# Altium PCB HANDS_FREE_ControlUnit_V2.PcbDoc (part 3 of 3)
Units mil, origin at the board's own origin, x right, y up, seen from the top; angles counter-clockwise.
Board outline 2130 x 3330 mil, 2 copper layers (Top Layer, Bottom Layer); 111 components, 108 nets, 500 pads, 191 vias.
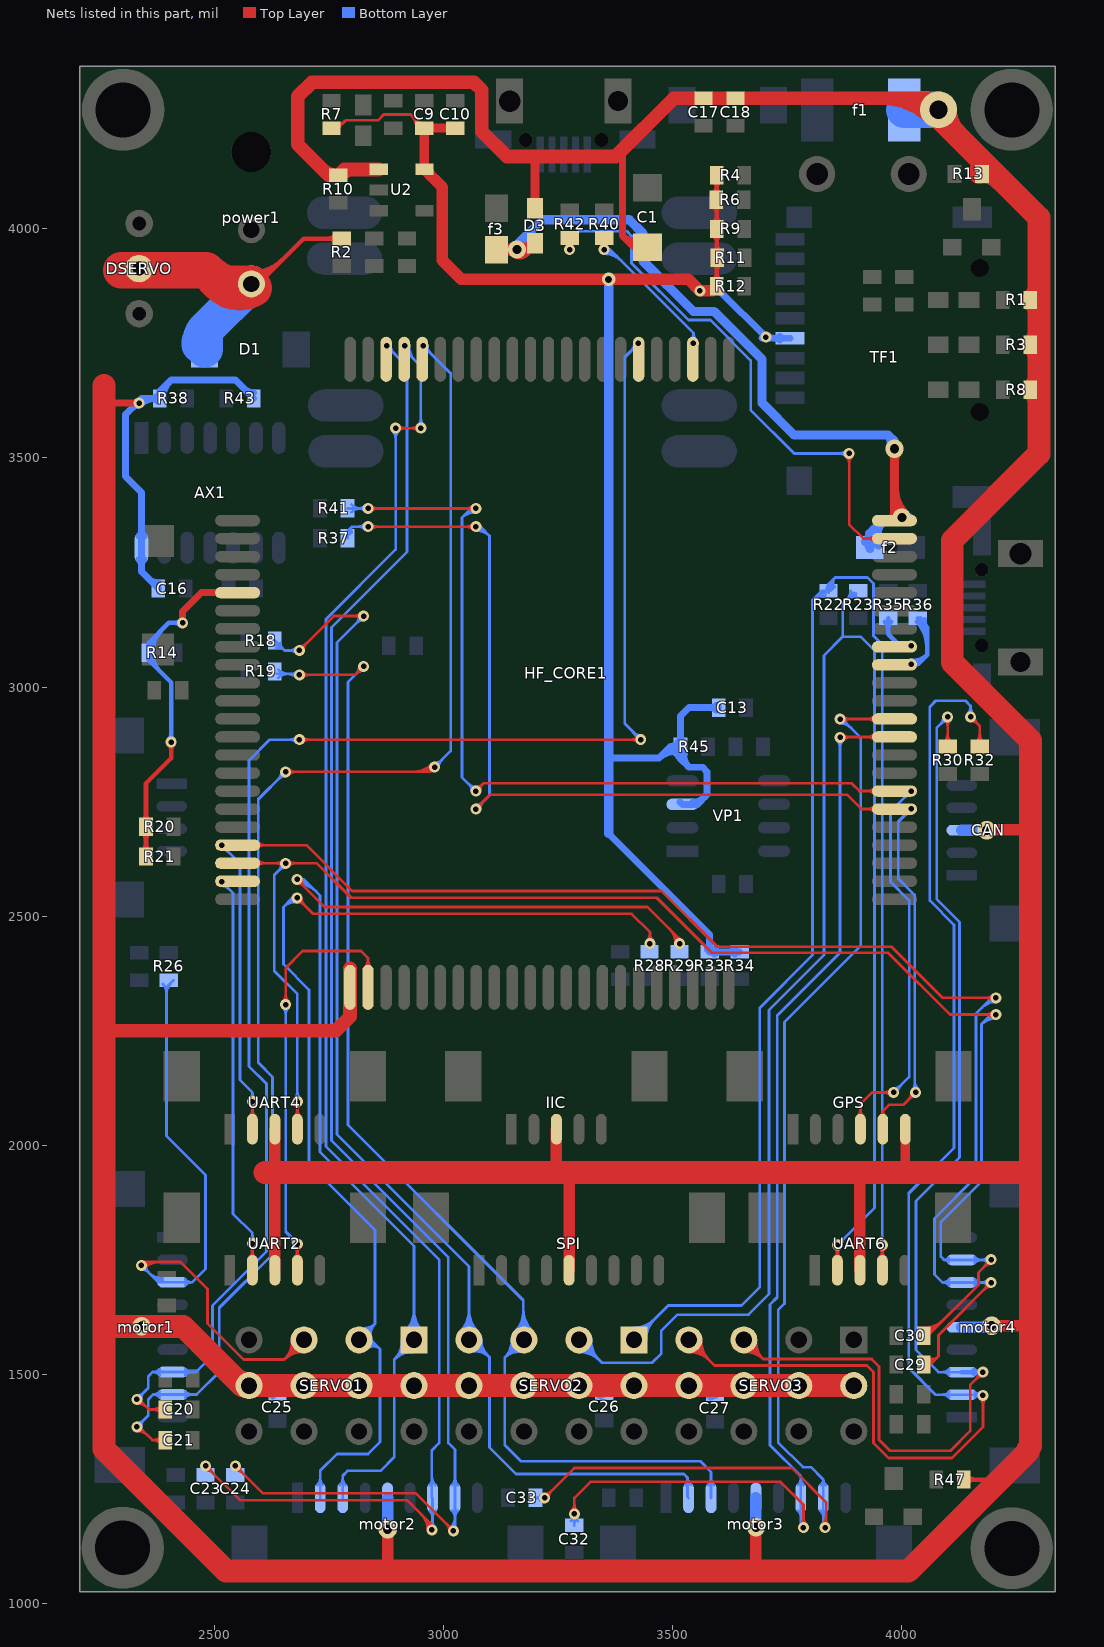
[diagram p3: the nets of this part, all layers, seen from the top]

## Via types
v1: diameter 24, hole 12, Top Layer to Bottom Layer, 168 vias
v2: diameter 40, hole 20, Top Layer to Bottom Layer, 10 vias
v3: diameter 30, hole 15, Top Layer to Bottom Layer, 10 vias
v4: diameter 80, hole 40, Top Layer to Bottom Layer, 3 vias

## Nets (pads, with @x,y where several pads share a name; then routed paths per layer and width w, separated by ;. In a path a pad name is that pad's centre, name@x,y a point inside that pad or via, vN(x,y) a via of type N, cw(c..) or ccw(c..) an arc to the next point about the centre after c; other vN are vias at no path point) (continued)
TIM1_PWMOUT2: motor1.3 R26.2 SERVO1.7 | length 1807.9
  Top Layer w6: v1@2337.88,1739.79 cw(c2350.46,1727.2) 2350.46,1745 ; v1(2340,1737.67) 2347.33,1745 2425,1745 2484,1686 2484,1611 2563,1532 2652,1532 ; v1@2342.12,1735.55 cw(c2364.95,1712.72) 2364.95,1745 ; v1@2346.36,1731.3 cw(c2379.43,1698.23) 2379.43,1745 ; SERVO1.7@2668.49,1574.01 cw(c2612.1,1571.91) 2652,1532 ; SERVO1.7@2674.49,1574.23 cw(c2630.85,1572.61) 2661.73,1541.73 cw(c2692.61,1510.85) SERVO1.7@2694.23,1554.49 ; SERVO1.7@2680.48,1574.46 cw(c2649.6,1573.31) 2671.45,1551.45 cw(c2693.31,1529.6) SERVO1.7@2694.46,1560.48 ; SERVO1.7@2694.01,1548.49 ccw(c2691.91,1492.1) 2652,1532 ; SERVO1.7@2695,1575 2652,1532
  Bottom Layer w6: v1@2340,1728.67 cw(c2340,1706.94) 2355.36,1722.3 cw(c2370.73,1737.67) v1@2349,1737.67 ; v1(2340,1737.67) 2377.09,1700.57 motor1.3@2408,1700.57 2450.57,1700.57 ; 2355.51,1722.16 ccw(c2386.35,1753) motor1.3@2386.35,1709.39 ; 2365.75,1711.92 ccw(c2386.35,1732.52) motor1.3@2386.35,1703.39 ; R26.2@2386.51,2351.51 cw(c2366.03,2331.03) 2395,2331.03 cw(c2423.97,2331.03) R26.2@2403.48,2351.51 ; R26.2@2410,2360 2395,2345 2395,2020 2480,1935 2480,1730 2450.57,1700.57 ; motor1.3@2435.96,1694.42 cw(c2450.57,1680.14) 2450.57,1700.57 ; motor1.3@2435.96,1706.73 ccw(c2450.57,1721) 2450.57,1700.57
TIM1_PWMOUT3: motor2.2 R28.2 SERVO1.4 | length 2759.9
  Top Layer w6: v1@2680,2531 cw(c2680,2509.27) 2695.36,2524.64 cw(c2710.73,2540) v1@2689,2540 ; v1(2680,2540) 2715,2505 3410,2505 3450,2465 v1(3450,2440) ; v1@3443.64,2446.36 ccw(c3428.27,2461.73) 3450,2461.73 ccw(c3471.73,2461.73) v1@3456.36,2446.36
  Bottom Layer w6: 2659.33,2529.33 cw(c2678,2510.66) v1@2679.8,2537.01 ; v1@2679.39,2531.02 ccw(c2676.82,2493.19) 2650,2520 ; v1(2680,2540) 2670,2540 2650,2520 ; motor2.2@2723.98,1257.88 ccw(c2708.94,1272.93) 2730.21,1272.93 ccw(c2751.48,1272.93) motor2.2@2736.44,1257.88 ; motor2.2@2730.21,1230 2730.21,1289.21 2767,1326 2835,1326 2861,1352 2861,1555 ; SERVO1.4@2815,1577 SERVO1.4@2815,1575 2850,1610 ; SERVO1.4@2819.05,1595.12 ccw(c2824.07,1620.09) 2842.08,1602.08 ccw(c2860.09,1584.07) SERVO1.4@2835.12,1579.05 ; SERVO1.4@2820.23,1601.01 ccw(c2826.73,1633.27) 2850,1610 ; SERVO1.4@2820.79,1568.74 cw(c2834.02,1554.47) 2847.77,1568.23 ; SERVO1.4@2824.87,1564.34 cw(c2838.25,1549.89) 2852.18,1563.82 ; SERVO1.4@2828.95,1559.94 cw(c2842.49,1545.31) 2856.59,1559.41 ; SERVO1.4@2830,1575 2841,1575 2861,1555 ; SERVO1.4@2833.03,1555.54 cw(c2846.73,1540.74) 2861,1555 ; SERVO1.4@2841.01,1580.23 cw(c2873.27,1586.73) 2850,1610 ; 2650,2520 2650,2395 2706,2339 2706,1959 2850,1815 2850,1610
TIM1_PWMOUT4: motor2.3 R29.2 SERVO1.1 | length 3180.1
  Top Layer w6: v1@2680,2571 cw(c2680,2549.27) 2695.36,2564.64 cw(c2710.73,2580) v1@2689,2580 ; v1(2680,2580) 2740,2520 3445,2520 3515,2450 v1(3515,2440) ; 3492.56,2472.44 cw(c3460.13,2440) v1@3506,2440 ; 3502.81,2462.19 cw(c3480.62,2440) v1@3512,2440 ; 3513.05,2451.95 cw(c3501.1,2440) v1@3518,2440
  Bottom Layer w6: v1@2680,2571 cw(c2680,2513.06) 2720.97,2554.03 ; v1@2680,2577 cw(c2680,2533.54) 2710.73,2564.27 ; v1(2680,2580) 2695,2580 ; v1@2680,2583 cw(c2680,2554.03) 2700.49,2574.51 ; v1@2687.94,2575.77 cw(c2695,2572) 2695,2580 ; v1@2687.94,2584.23 ccw(c2695,2588) 2695,2580 ; motor2.3@2773.19,1257.88 ccw(c2758.15,1272.93) 2779.43,1272.93 ccw(c2800.7,1272.93) motor2.3@2785.66,1257.88 ; motor2.3@2779.43,1230 2779.43,1278.43 2790,1289 2862,1289 2892,1319 2892,1532 ; SERVO1.1@2908.49,1574.01 cw(c2852.1,1571.91) 2892,1532 ; SERVO1.1@2914.49,1574.23 cw(c2870.85,1572.61) 2901.73,1541.73 cw(c2932.61,1510.85) SERVO1.1@2934.23,1554.49 ; SERVO1.1@2916.24,1593.76 ccw(c2870.96,1639.04) 2935,1639.04 ccw(c2999.04,1639.04) SERVO1.1@2953.76,1593.76 ; SERVO1.1@2920.48,1574.46 cw(c2889.6,1573.31) 2911.45,1551.45 cw(c2933.31,1529.6) SERVO1.1@2934.46,1560.48 ; SERVO1.1@2920.48,1589.52 ccw(c2885.44,1624.56) 2935,1624.56 ccw(c2984.56,1624.56) SERVO1.1@2949.52,1589.52 ; SERVO1.1@2924.73,1585.27 ccw(c2899.93,1610.07) 2935,1610.07 ccw(c2970.07,1610.07) SERVO1.1@2945.27,1585.27 ; SERVO1.1@2934.01,1548.49 ccw(c2931.91,1492.1) 2892,1532 ; 2695,2580 2730,2545 2730,1985 2935,1780 SERVO1.1@2935,1575 2892,1532
TIM2_ENCODR1_A: C20.2 HF_CORE1.72 motor1.7 | length 3786.7
  Top Layer w6: v1@2330,1436 cw(c2330,1402.2) 2353.9,1426.1 ; v1@2330,1442 cw(c2330,1422.69) 2343.66,1436.34 ; v1(2330,1445) 2335,1445 2357,1423 C20.2@2392,1423 ; v1@2339,1445 ccw(c2348.66,1445) 2341.83,1438.17 ; C20.2@2383.51,1414.51 ccw(c2363.03,1394.03) 2363.03,1423 ccw(c2363.03,1451.97) C20.2@2383.51,1431.48 ; v1(2685,2885) v1(3430,2885) ; v1@2691.36,2878.64 cw(c2706.73,2863.27) 2706.73,2885 cw(c2706.73,2906.73) v1@2691.36,2891.36 ; v1@3423.64,2878.64 ccw(c3408.27,2863.27) 3408.27,2885 ccw(c3408.27,2906.73) v1@3423.64,2891.36
  Bottom Layer w6: v1(2330,1445) 2355,1470 2355,1495 2364.57,1504.57 motor1.7@2408,1504.57 2459.57,1504.57 2495,1540 2495,1650 2613,1768 2613,2134 2575,2172 2575,2840 2620,2885 v1(2685,2885) ; v1@2330,1454 ccw(c2330,1475.73) 2345.36,1460.36 ccw(c2360.73,1445) v1@2339,1445 ; motor1.7@2380.12,1498.34 ccw(c2365.07,1483.3) 2365.07,1504.57 ccw(c2365.07,1525.85) motor1.7@2380.12,1510.81 ; motor1.7@2435.88,1498.34 cw(c2450.93,1483.3) 2450.93,1504.57 cw(c2450.93,1525.85) motor1.7@2435.88,1510.81 ; v1@2678.64,2878.64 ccw(c2663.27,2863.27) 2663.27,2885 ccw(c2663.27,2906.73) v1@2678.64,2891.36 ; v1@3416,3750 cw(c3394.27,3750) 3409.64,3734.64 cw(c3425,3719.27) v1@3425,3741 ; v1@3421,2885 ccw(c3399.27,2885) 3414.64,2900.36 ccw(c3430,2915.73) v1@3430,2894 ; v1(3425,3750) 3395,3720 3395,2920 v1(3430,2885)
TIM2_ENCODR1_B: C21.2 HF_CORE1.84 motor1.8 | length 3442.6
  Top Layer w6: v1@2330,1376 cw(c2330,1342.2) 2353.9,1366.1 ; v1@2330,1382 cw(c2330,1362.69) 2343.66,1376.34 ; v1(2330,1385) 2335,1385 2364,1356 ; v1@2339,1385 ccw(c2348.66,1385) 2341.83,1378.17 ; C21.2@2383.31,1347.72 ccw(c2364,1329.34) 2364,1356 ; C21.2@2383.31,1364.27 cw(c2364,1382.66) 2364,1356 ; C21.2@2392,1356 2364,1356 ; v1(2655,2815) 2970,2815 ; v1@2661.36,2808.64 cw(c2676.73,2793.27) 2676.73,2815 cw(c2676.73,2836.73) v1@2661.36,2821.36 ; 2934.13,2815 ccw(c2934.13,2870.87) v1@2973.64,2831.36 ; 2948.62,2815 ccw(c2948.62,2856.38) v1@2977.88,2827.12 ; 2963.1,2815 ccw(c2963.1,2841.9) v1@2982.12,2822.88 ; v1@2971.54,2821.93 cw(c2965.33,2819.67) 2970,2815 ; v1@2976.93,2816.54 ccw(c2974.67,2810.33) 2970,2815 ; v1(2980,2825) 2970,2815
  Bottom Layer w6: v1(2330,1385) 2355,1410 2355,1445 2365.57,1455.57 motor1.8@2408,1455.57 2460.57,1455.57 2510,1505 2510,1645 2626,1761 2626,2149 2595,2180 2595,2755 v1@2650,2810 ; v1@2330,1394 ccw(c2330,1415.73) 2345.36,1400.36 ccw(c2360.73,1385) v1@2339,1385 ; motor1.8@2380.01,1449.45 ccw(c2365.58,1435.5) 2365.58,1455.57 ccw(c2365.58,1475.65) motor1.8@2380.01,1461.7 ; motor1.8@2435.88,1449.34 cw(c2450.93,1434.3) 2450.93,1455.57 cw(c2450.93,1476.85) motor1.8@2435.88,1461.81 ; v1@2646,2815 cw(c2624.27,2815) 2639.64,2799.64 cw(c2655,2784.27) v1@2655,2806 ; v1@2955,3736 cw(c2955,3714.27) 2970.36,3729.64 cw(c2985.73,3745) v1@2964,3745 ; v1(2955,3745) 3015,3685 3015,2860 v1(2980,2825) ; v1@2980,2834 ccw(c2980,2855.73) 2995.36,2840.36 ccw(c3010.73,2825) v1@2989,2825
TIM3_ENCODR2_A: C23.2 HF_CORE1.85 motor2.7 | length 3809.2
  Top Layer w6: v1@2480,1291 cw(c2480,1269.27) 2495.36,1284.64 cw(c2510.73,1300) v1@2489,1300 ; v1(2480,1300) 2555,1225 2920,1225 2974,1171 v1(2974,1160) ; v1(2895,3565) v1(2950,3565) ; v1@2901.36,3558.64 cw(c2916.73,3543.27) 2916.73,3565 cw(c2916.73,3586.73) v1@2901.36,3571.36 ; v1@2943.64,3558.64 ccw(c2928.27,3543.27) 2928.27,3565 ccw(c2928.27,3586.73) v1@2943.64,3571.36 ; 2950.86,1194.14 cw(c2916.72,1160) v1@2965,1160 ; 2961.1,1183.9 cw(c2937.2,1160) v1@2971,1160 ; 2971.34,1173.66 cw(c2957.69,1160) v1@2977,1160
  Bottom Layer w6: v1@2888.64,3558.64 cw(c2873.27,3543.27) 2895,3543.27 cw(c2916.73,3543.27) v1@2901.36,3558.64 ; v1(2895,3565) 2895,3300 2743,3148 2743,1997 2990,1750 2990,1350 2974,1334 2974,1231.43 motor2.7@2975.43,1230 v1@2975.43,1161.43 ; v1@2912,3745 ccw(c2928.9,3745) 2916.95,3733.05 ; v1(2915,3745) 2915,3735 2950,3700 v1(2950,3565) ; v1@2918,3745 ccw(c2949.38,3745) 2927.19,3722.81 ; v1@2924,3745 ccw(c2969.87,3745) 2937.44,3712.56 ; v1@2943.64,3571.36 ccw(c2928.27,3586.73) 2950,3586.73 ccw(c2971.73,3586.73) v1@2956.36,3571.36 ; v1@2967.64,1166.36 ccw(c2948.83,1185.17) 2975.43,1185.17 ; motor2.7@2969.19,1202.12 cw(c2954.15,1187.07) 2975.43,1187.07 cw(c2996.7,1187.07) motor2.7@2981.66,1202.12 ; motor2.7@2969.19,1257.88 ccw(c2957.59,1269.48) 2974,1269.48 ; 2974,1276.37 ccw(c3000.14,1276.37) motor2.7@2981.66,1257.88 ; 2975.43,1178.29 ccw(c2992.29,1178.29) v1@2980.36,1166.36
TIM3_ENCODR2_B: C24.2 HF_CORE1.86 motor2.8 | length 3535.2
  Top Layer w6: v1@2545,1291 cw(c2545,1269.27) 2560.36,1284.64 cw(c2575.73,1300) v1@2554,1300 ; v1(2545,1300) 2605,1240 2939,1240 v1(3021,1158) ; v1@3012,1158 ccw(c2990.27,1158) 3005.64,1173.36 ccw(c3021,1188.73) v1@3021,1167
  Bottom Layer w6: v1@2875,3736 cw(c2875,3714.27) 2890.36,3729.64 cw(c2905.73,3745) v1@2884,3745 ; v1(2875,3745) 2920,3700 2920,3295 2755,3130 2755,2010 3010,1755 3010,1350 3024.43,1335.57 motor2.8@3024.43,1230 v1@3024.43,1161.43 ; v1@3014.64,1164.36 ccw(c2991,1188) 3024.43,1188 ; motor2.8@3018.19,1202.12 cw(c3003.15,1187.07) 3024.43,1187.07 cw(c3045.7,1187.07) motor2.8@3030.66,1202.12 ; motor2.8@3018.19,1257.88 ccw(c3003.15,1272.93) 3024.43,1272.93 ccw(c3045.7,1272.93) motor2.8@3030.66,1257.88 ; v1@3018.88,1160.12 ccw(c3005.49,1173.51) 3024.43,1173.51 ; 3024.43,1171.46 ccw(c3034.46,1171.46) v1@3027.36,1164.36
TIM4_ENCODR3_A: C32.2 HF_CORE1.54 motor3.7 | length 2943
  Top Layer w6: v1@3278.64,1201.36 ccw(c3263.27,1216.73) 3285,1216.73 ccw(c3306.73,1216.73) v1@3291.36,1201.36 ; v1(3285,1195) 3285,1230 3320,1265 3735,1265 3785,1215 v1(3785,1165) ; v1@3778.64,1171.36 ccw(c3763.27,1186.73) 3785,1186.73 ccw(c3806.73,1186.73) v1@3791.36,1171.36 ; v1(3865,2890) 3865,2891.05 HF_CORE1.54@3984,2891.05 ; v1@3871.36,2883.64 cw(c3889.26,2865.74) 3889.26,2891.05 ; v1@3871.36,2896.36 ccw(c3884.19,2909.19) 3884.19,2891.05 ; HF_CORE1.54@3940.57,2884.33 ccw(c3924.35,2868.12) 3924.35,2891.05 ccw(c3924.35,2913.99) HF_CORE1.54@3940.57,2897.77
  Bottom Layer w6: C32.2@3277.49,1179.36 ccw(c3264.96,1195) v1(3285,1195) ; v1@3278.64,1188.64 cw(c3263.27,1173.27) 3285,1173.27 cw(c3306.73,1173.27) v1@3291.36,1188.64 ; C32.2@3285,1170 v1(3285,1195) ; C32.2@3292.51,1179.36 cw(c3305.04,1195) v1(3285,1195) ; motor3.7@3773.19,1202.12 cw(c3758.15,1187.07) 3779.43,1187.07 cw(c3800.7,1187.07) motor3.7@3785.66,1202.12 ; motor3.7@3773.19,1257.88 ccw(c3758.15,1272.93) 3779.43,1272.93 ccw(c3800.7,1272.93) motor3.7@3785.66,1257.88 ; v1@3779.43,1170.57 motor3.7@3779.43,1230 3779.43,1277.57 3712,1345 3712,1652 3728,1668 3728,2283 3865,2420 v1@3865,2895 ; 3779.43,1185.7 ccw(c3805.7,1185.7) v1@3787.12,1167.12 ; motor3.7@3779.43,1200.19 ccw(c3820.19,1200.19) v1@3791.36,1171.36 ; v1@3858.64,2883.64 cw(c3843.27,2868.27) 3865,2868.27 cw(c3886.73,2868.27) v1@3871.36,2883.64
TIM4_ENCODR3_B: C33.2 HF_CORE1.55 motor3.8 | length 3155.4
  Top Layer w6: v1(3220,1230) 3285,1295 3760,1295 3835,1220 3835,1167.5 v1(3832.5,1165) ; v1@3220,1239 ccw(c3220,1260.73) 3235.36,1245.36 ccw(c3250.73,1230) v1@3229,1230 ; v1@3826.14,1171.36 ccw(c3804.74,1192.76) 3835,1192.76 ; v1@3830.38,1167.12 ccw(c3819.22,1178.28) 3835,1178.28 ; 3835,1180.69 ccw(c3848.19,1180.69) v1@3838.86,1171.36 ; v1@3865,2935 3869.58,2930.42 HF_CORE1.55@3984,2930.42 ; v1@3871.36,2923.64 cw(c3887.74,2907.26) 3887.74,2930.42 ; v1@3871.36,2936.36 ccw(c3885.71,2950.71) 3885.71,2930.42 ; HF_CORE1.55@3940.57,2923.7 ccw(c3924.35,2907.49) 3924.35,2930.42 ccw(c3924.35,2953.36) HF_CORE1.55@3940.57,2937.14
  Bottom Layer w6: C33.2@3210.59,1224.35 cw(c3220,1219.34) v1(3220,1230) ; C33.2@3210.59,1235.65 ccw(c3220,1240.66) v1(3220,1230) ; C33.2@3213.26,1224.03 ccw(c3200,1212.28) C33.2@3200,1230 ; C33.2@3213.26,1235.97 cw(c3200,1247.72) C33.2@3200,1230 ; motor3.8@3822.19,1202.12 cw(c3807.15,1187.07) 3828.43,1187.07 cw(c3849.7,1187.07) motor3.8@3834.66,1202.12 ; motor3.8@3822.75,1258.4 ccw(c3812.52,1270.57) 3828.43,1270.57 ; v1@3826.14,1171.36 ccw(c3820.61,1176.89) 3828.43,1176.89 ; v1@3828.43,1169.07 motor3.8@3828.43,1230 3828.43,1270.57 ; 3828.43,1182.08 ccw(c3849.58,1182.08) v1@3834.62,1167.12 ; motor3.8@3828.43,1196.57 ccw(c3864.07,1196.57) v1@3838.86,1171.36 ; motor3.8@3834.1,1258.4 cw(c3844.33,1270.57) 3828.43,1270.57 ; v1@3865,2921 cw(c3865,2887.2) 3888.9,2911.1 ; v1@3865,2925 3865,2935 3910,2890 3910,2435 3744,2269 3744,1654 3730,1640 3730,1351 3784,1297 3802,1297 3828.43,1270.57 ; v1@3865,2927 cw(c3865,2907.69) 3878.66,2921.34 ; v1@3874,2930 ccw(c3883.66,2930) 3876.83,2923.17 ; C33.2@3200,1230 v1(3220,1230)
  other v1: 3865,2930
TIM5_ENCODR4_A: C29.2 HF_CORE1.19 motor4.7 UART4.2 | length 3978.7
  Top Layer w6: HF_CORE1.19@2550,2654.83 2700.17,2654.83 2800,2555 3475,2555 3597,2433 3977,2433 4088.33,2321.67 v1(4205,2321.67) ; v1@2575.85,2088.64 cw(c2560.48,2073.27) 2582.21,2073.27 cw(c2603.94,2073.27) v1@2588.58,2088.64 ; UART4.2@2575.98,2062.88 ccw(c2560.94,2077.93) 2582.21,2077.93 ccw(c2603.48,2077.93) UART4.2@2588.44,2062.88 ; UART4.2@2582.21,2035 v1(2582.21,2095) ; HF_CORE1.19@2593.43,2648.11 cw(c2609.65,2631.9) 2609.65,2654.83 cw(c2609.65,2677.77) HF_CORE1.19@2593.43,2661.55 ; C29.2@4044.8,1520.93 ccw(c4053.09,1534.06) 4064.08,1523.08 ; C29.2@4047,1506 4080,1539 ; C29.2@4048,1526 ccw(c4057.2,1540.57) 4069.38,1528.38 ; C29.2@4051.2,1531.07 ccw(c4061.31,1547.07) 4074.69,1533.69 ; C29.2@4054.41,1536.15 ccw(c4065.42,1553.58) 4080,1539 ; v1@4186,1700 cw(c4164.27,1700) 4179.64,1684.64 cw(c4195,1669.27) v1@4195,1691 ; v1(4195,1700) 4080,1585 4080,1539 ; v1@4198.64,2315.3 ccw(c4183.27,2299.94) 4183.27,2321.67 ccw(c4183.27,2343.39) v1@4198.64,2328.03
  Bottom Layer w6: v1@2515,2646 cw(c2515,2624.27) 2530.36,2639.64 cw(c2545.73,2655) v1@2524,2655 ; v1(2515,2655) 2555,2615 2555,2142 2582.21,2114.79 ; v1@2576.3,2101.78 ccw(c2564.96,2114.79) 2582.21,2114.79 ; v1(2582.21,2095) 2582.21,2114.79 ; v1@2588.13,2101.78 cw(c2599.46,2114.79) 2582.21,2114.79 ; motor4.7@4103.01,1694.3 ccw(c4088.58,1680.35) 4088.58,1700.43 ccw(c4088.58,1720.5) motor4.7@4103.01,1706.55 ; motor4.7@4158.88,1694.19 cw(c4173.93,1679.15) 4173.93,1700.43 cw(c4173.93,1721.7) motor4.7@4158.88,1706.66 ; 4172.25,1700.43 cw(c4172.25,1677.25) v1@4188.64,1693.64 ; 4174.3,1700.43 ccw(c4174.3,1720.7) v1@4188.64,1706.36 ; 4175.41,2300.41 cw(c4205,2270.82) v1@4205,2312.67 ; 4185.65,2310.65 cw(c4205,2291.31) v1@4205,2318.67 ; v1(4195,1700) 4194.57,1700.43 motor4.7@4131,1700.43 4088.57,1700.43 4071,1718 4071,1840 4162,1931 4162,2287 4196.67,2321.67 v1(4205,2321.67)
TIM5_ENCODR4_B: C30.2 HF_CORE1.20 motor4.8 UART4.4 | length 3903
  Top Layer w6: HF_CORE1.20@2555.46,2610 HF_CORE1.20@2550,2615.46 2722.57,2615.46 2798.03,2540 3465,2540 3585,2420 3970,2420 4105,2285 v1(4205,2285) ; HF_CORE1.20@2593.43,2608.74 cw(c2609.65,2592.53) 2609.65,2615.46 cw(c2609.65,2638.4) HF_CORE1.20@2593.43,2622.18 ; 2632.16,2615.46 cw(c2632.16,2592.16) v1@2648.64,2608.64 ; 2634.38,2615.46 ccw(c2634.38,2635.62) v1@2648.64,2621.36 ; v1@2661.36,2608.64 cw(c2677.84,2592.16) 2677.84,2615.46 ; v1@2661.36,2621.36 ccw(c2675.62,2635.62) 2675.62,2615.46 ; v1@2674.06,2088.64 cw(c2658.7,2073.27) 2680.43,2073.27 cw(c2702.15,2073.27) v1@2686.79,2088.64 ; UART4.4@2674.19,2062.88 ccw(c2659.15,2077.93) 2680.43,2077.93 ccw(c2701.7,2077.93) UART4.4@2686.66,2062.88 ; UART4.4@2680.43,2035 v1(2680.43,2095) ; C30.2@4048,1584 4056,1584 4167,1695 4167,1722 v1(4195,1750) ; C30.2@4048,1589 ccw(c4048,1620.38) 4070.19,1598.19 ; C30.2@4048,1595 ccw(c4048,1640.87) 4080.44,1608.44 ; C30.2@4048,1601 ccw(c4048,1661.35) 4090.68,1618.68 ; v1@4186,1750 cw(c4164.27,1750) 4179.64,1734.64 cw(c4195,1719.27) v1@4195,1741 ; v1@4198.64,2278.64 ccw(c4183.27,2263.27) 4183.27,2285 ccw(c4183.27,2306.73) v1@4198.64,2291.36
  Bottom Layer w6: v1@2646,2615 cw(c2624.27,2615) 2639.64,2599.64 cw(c2655,2584.27) v1@2655,2606 ; v1(2655,2615) 2630,2590 2630,2380 2680.43,2329.57 v1(2680.43,2095) ; v1@2674.06,2101.36 ccw(c2658.7,2116.73) 2680.43,2116.73 ccw(c2702.15,2116.73) v1@2686.79,2101.36 ; motor4.8@4102.09,1744.43 ccw(c4092.58,1737.87) 4092.58,1749.43 ccw(c4092.58,1760.98) motor4.8@4102.09,1754.42 ; motor4.8@4158.88,1743.19 cw(c4173.93,1728.15) 4173.93,1749.43 cw(c4173.93,1770.7) motor4.8@4158.88,1755.66 ; 4171.88,1749.43 ccw(c4171.88,1773.12) v1@4188.64,1756.36 ; 4174.66,1749.43 cw(c4174.66,1729.66) v1@4188.64,1743.64 ; 4183.71,2273.71 cw(c4203.78,2253.63) v1@4204.88,2282 ; v1(4195,1750) 4194.43,1749.43 motor4.8@4131,1749.43 4092.57,1749.43 4085,1757 4085,1832 4174,1921 4174,2264 ; v1@4204.65,2276.01 ccw(c4203.06,2234.94) 4174,2264 ; v1(4205,2285) 4195,2285 4174,2264
TIM8_PWMOUT1: R23.1 SERVO2.4 UART6.2 | length 4038.9
  Top Layer w6: v1@3852.85,1775.42 cw(c3837.48,1760.06) 3859.21,1760.06 cw(c3880.94,1760.06) v1@3865.58,1775.42 ; UART6.2@3852.98,1754.88 ccw(c3837.94,1769.93) 3859.21,1769.93 ccw(c3880.48,1769.93) UART6.2@3865.44,1754.88 ; v1@3854.09,1774.39 cw(c3848.83,1766.81) 3857.74,1764.43 ; v1@3854.71,1773.99 cw(c3849.09,1764.25) 3859.95,1767.16 ; 3858.47,1767.16 cw(c3869.34,1764.25) v1@3863.71,1773.99 ; UART6.2@3859.21,1727 v1(3859.21,1781.79) ; 3860.69,1764.43 cw(c3869.59,1766.81) v1@3864.34,1774.39
  Bottom Layer w6: SERVO2.4@3295,1548.47 cw(c3295,1484.43) 3340.29,1529.71 cw(c3385.57,1575) SERVO2.4@3321.53,1575 ; SERVO2.4@3295,1554.47 cw(c3295,1504.91) 3330.04,1539.96 cw(c3365.09,1575) SERVO2.4@3315.53,1575 ; SERVO2.4@3295,1560.47 cw(c3295,1525.4) 3319.8,1550.2 cw(c3344.6,1575) SERVO2.4@3309.53,1575 ; SERVO2.4@3297,1575 SERVO2.4@3295,1575 3345,1525 3455,1525 3475,1545 3475,1595 3510,1630 3665,1630 3710,1675 3710,2295 3830,2415 3830,3069 3871,3110 ; v1(3859.21,1781.79) 3940,1862.57 3940,3080 3910,3110 3871,3110 ; v1@3859.21,1790.79 ccw(c3859.21,1812.52) 3874.58,1797.15 ccw(c3889.94,1781.79) v1@3868.21,1781.79 ; 3877.82,3188.82 cw(c3899.99,3166.65) R23.1@3899.99,3198 ; 3880.2,3191.2 ccw(c3861.4,3210) R23.1@3887.99,3210 ; R23.1@3888.06,3199.06 cw(c3899.99,3187.14) R23.1@3899.99,3204 ; R23.1@3895,3206 3871,3182 3871,3110
TIM8_PWMOUT2: R22.1 SERVO2.1 UART6.4 | length 4023
  Top Layer w6: v1@3951.06,1775.64 cw(c3935.7,1760.27) 3957.43,1760.27 cw(c3979.15,1760.27) v1@3963.79,1775.64 ; UART6.4@3951.19,1754.88 ccw(c3936.15,1769.93) 3957.43,1769.93 ccw(c3978.7,1769.93) UART6.4@3963.66,1754.88 ; UART6.4@3957.43,1727 v1(3957.43,1782)
  Bottom Layer w6: SERVO2.1@3415,1575 3490,1650 3650,1650 3690,1690 3690,2300 3805,2415 3805,3190 ; SERVO2.1@3415,1589.53 ccw(c3415,1624.6) 3439.8,1599.8 ccw(c3464.6,1575) SERVO2.1@3429.53,1575 ; SERVO2.1@3415,1595.53 ccw(c3415,1645.09) 3450.04,1610.04 ccw(c3485.09,1575) SERVO2.1@3435.53,1575 ; SERVO2.1@3415,1601.53 ccw(c3415,1665.57) 3460.29,1620.29 ccw(c3505.57,1575) SERVO2.1@3441.53,1575 ; 3812.87,3197.87 cw(c3829.13,3181.61) R22.1@3833.78,3204.13 ; R22.1@3832.57,3198.25 ccw(c3826.43,3168.57) 3805,3190 ; R22.1@3840.64,3205.88 cw(c3851.08,3215.76) 3840.92,3225.92 ; R22.1@3845,3210 cw(c3855.56,3220) 3845.28,3230.28 ; R22.1@3849.36,3214.13 cw(c3860.04,3224.24) 3849.64,3234.64 ; R22.1@3853.71,3218.25 cw(c3864.52,3228.48) 3854,3239 ; v1@3951.06,1788.36 ccw(c3935.7,1803.73) 3957.43,1803.73 ccw(c3979.15,1803.73) v1@3963.79,1788.36 ; v1(3957.43,1782) 3957.43,3092.57 3938,3112 3938,3226 3925,3239 3854,3239 ; 3805,3190 3825,3210 R22.1@3840,3210 3840,3225 3854,3239
TIM9_PWMOUT1: motor3.2 R18.2 SERVO2.10 | length 3335.2
  Top Layer w6: v1(2685,3080) 2760,3155 v1(2825,3155) ; v1@2685,3089 ccw(c2685,3110.73) 2700.36,3095.36 ccw(c2715.73,3080) v1@2694,3080 ; v1@2818.64,3148.64 ccw(c2803.27,3133.27) 2803.27,3155 ccw(c2803.27,3176.73) v1@2818.64,3161.36
  Bottom Layer w6: R18.2@2631,3101.5 2652.5,3080 ; R18.2@2632.56,3090.71 cw(c2635.95,3078.13) R18.2@2645.16,3087.34 ; R18.2@2634.12,3084.91 cw(c2639.06,3066.56) 2652.5,3080 ; R18.2@2643,3096.5 ccw(c2659.9,3096.5) 2647.95,3084.55 ; v1@2678.64,3073.64 ccw(c2663.27,3058.27) 2663.27,3080 ccw(c2663.27,3101.73) v1@2678.64,3086.36 ; v1(2685,3080) 2652.5,3080 ; v1@2816,3155 cw(c2794.27,3155) 2809.64,3139.64 cw(c2825,3124.27) v1@2825,3146 ; v1(2825,3155) 2767,3097 2767,2023 3055,1735 SERVO2.10@3055,1575 3062,1575 3100,1537 ; SERVO2.10@3036.24,1593.76 ccw(c2990.96,1639.04) 3055,1639.04 ccw(c3119.04,1639.04) SERVO2.10@3073.76,1593.76 ; SERVO2.10@3040.48,1589.52 ccw(c3005.44,1624.56) 3055,1624.56 ccw(c3104.56,1624.56) SERVO2.10@3069.52,1589.52 ; SERVO2.10@3044.73,1585.27 ccw(c3019.93,1610.07) 3055,1610.07 ccw(c3090.07,1610.07) SERVO2.10@3065.27,1585.27 ; SERVO2.10@3057.87,1560.76 cw(c3063.63,1532.27) 3084.18,1552.82 ; SERVO2.10@3059.06,1554.88 cw(c3066.28,1519.11) 3092.09,1544.91 ; SERVO2.10@3060.25,1549 cw(c3068.94,1505.94) 3100,1537 ; SERVO2.10@3075.53,1575 ccw(c3108.19,1575) 3085.09,1551.91 ; SERVO2.10@3081.53,1575 ccw(c3128.67,1575) 3095.34,1541.66 ; motor3.2@3527.98,1257.88 ccw(c3518.28,1267.58) 3532,1267.58 ; motor3.2@3534.21,1230 3532,1232.21 3532,1274 ; motor3.2@3539.57,1258.65 cw(c3551.35,1274) 3532,1274 ; 3100,1537 3100,1340 3158,1282 3524,1282 3532,1274
TIM9_PWMOUT2: motor3.3 R19.2 SERVO2.7 | length 3267.4
  Top Layer w6: v1(2685,3026.67) 2806.67,3026.67 v1(2825,3045) ; v1@2691.36,3020.3 cw(c2706.73,3004.94) 2706.73,3026.67 cw(c2706.73,3048.39) v1@2691.36,3033.03 ; v1@2816,3045 cw(c2794.27,3045) 2809.64,3029.64 cw(c2825,3014.27) v1@2825,3036
  Bottom Layer w6: R19.2@2636,3029 v1@2682.67,3029 ; R19.2@2639.48,3020.51 cw(c2659.97,3000.03) 2659.97,3029 cw(c2659.97,3057.97) R19.2@2639.48,3037.49 ; 2657.64,3029 cw(c2657.64,2999.31) v1@2678.64,3020.3 ; 2668.9,3029 ccw(c2668.9,3042.76) v1@2678.64,3033.03 ; 2672.12,3029 cw(c2672.12,3013.79) v1@2682.88,3024.55 ; v1@2686.67,3034 v1@2694,3026.67 ; v1@2816,3045 cw(c2794.27,3045) 2809.64,3029.64 cw(c2825,3014.27) v1@2825,3036 ; v1(2825,3045) 2791,3011 2791,2044 3173.5,1661.5 SERVO2.7@3173.5,1576.5 ; 3141.48,1544.48 cw(c3166.98,1518.99) SERVO2.7@3172.09,1554.68 ; 3142.96,1545.96 ccw(c3115.13,1573.79) SERVO2.7@3154.48,1574.58 ; SERVO2.7@3148.48,1574.46 cw(c3095.62,1573.39) 3133,1536 ; 3149.97,1552.97 cw(c3169.1,1533.83) SERVO2.7@3172.94,1560.62 ; SERVO2.7@3156.24,1593.76 ccw(c3114.58,1635.42) 3173.5,1635.42 ; SERVO2.7@3160.48,1589.52 ccw(c3129.06,1620.94) 3173.5,1620.94 ; SERVO2.7@3164.73,1585.27 ccw(c3143.55,1606.45) 3173.5,1606.45 ; SERVO2.7@3171.24,1548.74 ccw(c3164.85,1504.15) 3133,1536 ; 3173.5,1613.69 ccw(c3213.69,1613.69) SERVO2.7@3185.27,1585.27 ; 3173.5,1628.18 ccw(c3228.18,1628.18) SERVO2.7@3189.52,1589.52 ; 3173.5,1642.66 ccw(c3242.66,1642.66) SERVO2.7@3193.76,1593.76 ; motor3.3@3577.19,1257.88 ccw(c3562.15,1272.93) 3583.43,1272.93 ccw(c3604.7,1272.93) motor3.3@3589.66,1257.88 ; motor3.3@3583.43,1230 3583.43,1286.57 3560,1310 3169,1310 3133,1346 3133,1536 ; 3133,1536 SERVO2.7@3173.5,1576.5 ; SERVO2.7@3173.5,1576.5 3175,1578 SERVO2.7@3175,1575 SERVO2.7@3173.5,1576.5
TIM12_PWMOUT1: motor4.2 R32.1 SERVO3.10 | length 3348.6
  Top Layer w6: SERVO3.10@3535,1548.47 cw(c3535,1484.43) 3580.29,1529.71 cw(c3625.57,1575) SERVO3.10@3561.53,1575 ; SERVO3.10@3535,1554.47 cw(c3535,1504.91) 3570.04,1539.96 cw(c3605.09,1575) SERVO3.10@3555.53,1575 ; SERVO3.10@3535,1560.47 cw(c3535,1525.4) 3559.8,1550.2 cw(c3584.6,1575) SERVO3.10@3549.53,1575 ; SERVO3.10@3535,1575 3591,1519 3924,1519 3938,1505 3938,1350 3971,1317 4109,1317 4177,1385 v1(4177,1454) v1@4168,1454 ; v1@4150,2926 cw(c4150,2904.27) 4165.36,2919.64 cw(c4180.73,2935) v1@4159,2935 ; v1(4150,2935) 4170,2915 4170,2880 4160,2870 R32.1@4170,2870 ; R32.1@4161.52,2878.48 ccw(c4141.03,2898.97) 4170,2898.97 ccw(c4198.97,2898.97) R32.1@4178.49,2878.48 ; v1@4170.64,1447.64 cw(c4155.27,1432.27) 4177,1432.27 cw(c4198.73,1432.27) v1@4183.36,1447.64
  Bottom Layer w6: motor4.2@4103.12,1448.98 ccw(c4088.07,1433.94) 4088.07,1455.21 ccw(c4088.07,1476.48) motor4.2@4103.12,1461.44 ; v1@4143.64,2941.36 ccw(c4128.27,2956.73) 4150,2956.73 ccw(c4171.73,2956.73) v1@4156.36,2941.36 ; v1(4150,2935) 4150,2959 4139,2970 4074,2970 4061,2957 4061,2534 4114,2481 4114,1994 4015,1895 4015,1514 4073.79,1455.21 motor4.2@4131,1455.21 4175.79,1455.21 v1(4177,1454) ; motor4.2@4152.34,1455.21 cw(c4152.34,1429.34) v1@4170.64,1447.64 ; motor4.2@4158.2,1455.21 ccw(c4158.2,1472.8) 4170.64,1460.36 cw(c4164.8,1466.21) 4162.66,1458.23 cw(c4160.7,1450.89) v1@4168.16,1452.31 ; motor4.2@4158.88,1448.98 cw(c4173.93,1433.94) 4173.93,1455.21 cw(c4173.93,1476.48) motor4.2@4158.88,1461.44
TIM12_PWMOUT2: motor4.3 R30.1 SERVO3.7 | length 3001.5
  Top Layer w6: SERVO3.7@3655,1575 3697,1533 ; SERVO3.7@3655.79,1560.49 cw(c3657.39,1531.39) 3678,1552 cw(c3698.61,1572.61) SERVO3.7@3669.51,1574.21 ; SERVO3.7@3656.12,1554.5 cw(c3658.38,1513.38) 3687.5,1542.5 cw(c3716.62,1571.62) SERVO3.7@3675.5,1573.88 ; SERVO3.7@3656.45,1548.51 cw(c3659.36,1495.37) 3697,1533 ; SERVO3.7@3681.49,1573.55 ccw(c3734.63,1570.64) 3697,1533 ; R30.1@4091.52,2878.48 ccw(c4071.03,2898.97) 4100,2898.97 ccw(c4128.97,2898.97) R30.1@4108.49,2878.48 ; v1@4093.64,2928.64 cw(c4078.27,2913.27) 4100,2913.27 cw(c4121.73,2913.27) v1@4106.36,2928.64 ; R30.1@4100,2870 v1(4100,2935) ; v1@4168,1504.43 cw(c4146.27,1504.43) 4161.64,1489.06 cw(c4177,1473.7) v1@4177,1495.43 ; v1(4177,1504.43) 4149,1476.43 4149,1376 4106,1333 3974,1333 3950,1357 3950,1517 3934,1533 3697,1533
  Bottom Layer w6: v1@4091,2935 cw(c4069.27,2935) 4084.64,2919.64 cw(c4100,2904.27) v1@4100,2926 ; v1(4100,2935) 4076,2911 4076,2537 4126,2487 4126,1973 4031,1878 4031,1553 4079.57,1504.43 motor4.3@4131,1504.43 ; motor4.3@4103.12,1498.19 ccw(c4088.07,1483.15) 4088.07,1504.43 ccw(c4088.07,1525.7) motor4.3@4103.12,1510.66
  Bottom Layer w10: motor4.3@4131,1504.43 v1(4177,1504.43) ; motor4.3@4157.47,1499.61 cw(c4169.1,1487.98) 4169.1,1504.43 cw(c4169.1,1520.87) motor4.3@4157.47,1509.24 ; motor4.3@4164.3,1503.14 cw(c4165.93,1497.05) v1@4171.17,1500.55 ; motor4.3@4164.3,1505.71 ccw(c4165.93,1511.8) v1@4171.17,1508.31 ; 4164.92,1503.31 ccw(c4162.35,1512.88) v1@4170.94,1507.93 ; 4164.92,1505.55 cw(c4162.35,1495.97) v1@4170.94,1500.93 ; v1@4172.05,1499.48 ccw(c4160.1,1487.53) 4160.1,1504.43 ccw(c4160.1,1521.32) v1@4172.05,1509.37
USART2_RX: HF_CORE1.24 UART2.4 | length 1141.8
  Top Layer w6: v1@2648.64,2313.36 ccw(c2633.27,2328.73) 2655,2328.73 ccw(c2676.73,2328.73) v1@2661.36,2313.36 ; v1(2655,2307) 2655,2387 2692,2424 2819,2424 2834.6,2408.4 HF_CORE1.24@2834.6,2344.5 ; v1@2674.06,1777.64 cw(c2658.7,1762.27) 2680.43,1762.27 cw(c2702.15,1762.27) v1@2686.79,1777.64 ; UART2.4@2674.19,1754.88 ccw(c2659.15,1769.93) 2680.43,1769.93 ccw(c2701.7,1769.93) UART2.4@2686.66,1754.88 ; UART2.4@2680.43,1727 v1(2680.43,1784) ; HF_CORE1.24@2827.88,2387.93 ccw(c2811.66,2404.15) 2834.6,2404.15 ccw(c2857.53,2404.15) HF_CORE1.24@2841.32,2387.93
  Bottom Layer w6: v1@2648.64,2300.64 cw(c2633.27,2285.27) 2655,2285.27 cw(c2676.73,2285.27) v1@2661.36,2300.64 ; v1(2655,2307) 2655,1811 2680.43,1785.57 v1(2680.43,1784) ; 2663.95,1802.05 cw(c2645.9,1784) v1@2671.43,1784 ; 2667.75,1798.25 ccw(c2680.43,1810.93) v1@2680.43,1793
USART2_TX: HF_CORE1.21 UART2.2 | length 1011.6
  Top Layer w6: v1@2575.85,1778.64 cw(c2560.48,1763.27) 2582.21,1763.27 cw(c2603.94,1763.27) v1@2588.58,1778.64 ; UART2.2@2575.98,1754.88 ccw(c2560.94,1769.93) 2582.21,1769.93 ccw(c2603.48,1769.93) UART2.2@2588.44,1754.88 ; UART2.2@2582.21,1727 v1(2582.21,1785)
  Bottom Layer w6: v1@2515,2566 cw(c2515,2544.27) 2530.36,2559.64 cw(c2545.73,2575) v1@2524,2575 ; v1(2515,2575) 2540,2550 2540,1850 2582.21,1807.79 v1(2582.21,1785) ; v1@2575.85,1791.36 ccw(c2560.48,1806.73) 2582.21,1806.73 ccw(c2603.94,1806.73) v1@2588.58,1791.36
USART2USB_D+: HF_CORE1.59 R35.1 | length 159.8
  Bottom Layer w10: R35.1@3962.9,3142.93 cw(c3945.83,3125.86) 3969.97,3125.86 cw(c3994.12,3125.86) R35.1@3977.05,3142.93 ; R35.1@3969.97,3150 3969.97,3115.03 3995,3090 v1(4020,3090) ; v1@4015.05,3085.05 ccw(c4003.1,3073.1) 4003.1,3090 ccw(c4003.1,3106.9) v1@4015.05,3094.95
USART2USB_D-: HF_CORE1.58 R36.1 | length 341.4
  Bottom Layer w10: v1@4019.81,3047.01 ccw(c4021.45,3072.31) 4039.38,3054.38 ; v1(4020,3050) 4035,3050 ; v1@4020.45,3056.99 ccw(c4023.35,3101.64) 4055,3070 ; v1@4025.37,3045.5 cw(c4035,3037.43) 4035,3050 ; v1@4025.37,3054.5 ccw(c4035,3062.57) 4035,3050 ; R36.1@4032.93,3142.93 cw(c3979.65,3089.65) 4055,3089.65 ; R36.1@4035,3150 4055,3130 ; R36.1@4040,3140 cw(c4040,3127.93) R36.1@4048.54,3136.47 ; R36.1@4040,3150 cw(c4003.79,3113.79) 4055,3113.79 ; R36.1@4049.77,3147.86 ccw(c4068.71,3143.71) 4055,3130 ; 4035,3050 4055,3070 ; 4055,3070 4055,3130
USART3_RX: GPS.4 HF_CORE1.51 R41.1 | length 3144.1
  Top Layer w6: v1(2835,3390) v1(3070,3390) ; v1@2841.36,3383.64 cw(c2856.73,3368.27) 2856.73,3390 cw(c2856.73,3411.73) v1@2841.36,3396.36 ; v1@3063.64,3383.64 ccw(c3048.27,3368.27) 3048.27,3390 ccw(c3048.27,3411.73) v1@3063.64,3396.36 ; v1(3070,2772.94) 3087.06,2790 3890,2790 3907.06,2772.94 HF_CORE1.51@3984,2772.94 ; v1@3070,2781.94 ccw(c3070,2803.67) 3085.36,2788.3 ccw(c3100.73,2772.94) v1@3079,2772.94 ; GPS.4@3903.19,2062.88 ccw(c3888.15,2077.93) 3909.43,2077.93 ccw(c3930.7,2077.93) GPS.4@3915.66,2062.88 ; GPS.4@3909.43,2035 3909.43,2089.43 3935,2115 v1(3982,2115) ; HF_CORE1.51@3940.57,2766.22 ccw(c3924.35,2750.01) 3924.35,2772.94 ccw(c3924.35,2795.88) HF_CORE1.51@3940.57,2779.66 ; v1@3975.64,2108.64 ccw(c3960.27,2093.27) 3960.27,2115 ccw(c3960.27,2136.73) v1@3975.64,2121.36
  Bottom Layer w6: R41.1@2790,3390 v1(2835,3390) ; R41.1@2798.48,3381.52 cw(c2818.97,3361.03) 2818.97,3390 cw(c2818.97,3418.97) R41.1@2798.48,3398.49 ; v1@2828.64,3383.64 ccw(c2813.27,3368.27) 2813.27,3390 ccw(c2813.27,3411.73) v1@2828.64,3396.36 ; 3049.33,3379.33 cw(c3068,3360.66) v1@3069.8,3387.01 ; v1@3061,2772.94 ccw(c3039.27,2772.94) 3054.64,2788.3 ccw(c3070,2803.67) v1@3070,2781.94 ; v1@3069.39,3381.02 ccw(c3066.82,3343.19) 3040,3370 ; v1(3070,2772.94) 3040,2802.94 3040,3370 ; v1(3070,3390) 3060,3390 3040,3370 ; v1(3982,2115) 4016,2149 4016,2534 3975,2575 3975,2728 v1(4020,2773) ; v1@3982,2124 ccw(c3982,2145.73) 3997.36,2130.36 ccw(c4012.73,2115) v1@3991,2115 ; v1@4011,2773 cw(c3989.27,2773) 4004.64,2757.64 cw(c4020,2742.27) v1@4020,2764
USART3_TX: GPS.5 HF_CORE1.50 R37.2 | length 3075.8
  Top Layer w6: v1(2835,3350) v1@3060,3350 ; v1@2841.36,3343.64 cw(c2856.73,3328.27) 2856.73,3350 cw(c2856.73,3371.73) v1@2841.36,3356.36 ; v1@3063.64,3343.64 ccw(c3048.27,3328.27) 3048.27,3350 ccw(c3048.27,3371.73) v1@3063.64,3356.36 ; v1(3070,2733.57) 3101.43,2765 3880,2765 3911.43,2733.57 HF_CORE1.50@3984,2733.57 ; v1@3070,2742.57 ccw(c3070,2764.3) 3085.36,2748.93 ccw(c3100.73,2733.57) v1@3079,2733.57 ; HF_CORE1.50@3940.57,2726.85 ccw(c3924.35,2710.64) 3924.35,2733.57 ccw(c3924.35,2756.51) HF_CORE1.50@3940.57,2740.29 ; GPS.5@3953.09,2063.67 ccw(c3944.91,2074.42) 3958.43,2074.42 ccw(c3971.94,2074.42) GPS.5@3963.76,2063.67 ; GPS.5@3958.43,2035 3958.43,2074.43 3972,2088 4003,2088 v1(4030,2115) ; v1@4021,2115 cw(c3999.27,2115) 4014.64,2099.64 cw(c4030,2084.27) v1@4030,2106
  Bottom Layer w6: R37.2@2790,3325 2790,3340 2800,3350 ; R37.2@2794.67,3333.77 cw(c2801.38,3339.18) 2795.28,3345.28 ; R37.2@2799.34,3337.54 cw(c2806.6,3343.4) 2800,3350 ; v1@2828.64,3343.64 ccw(c2813.27,3328.27) 2813.27,3350 ccw(c2813.27,3371.73) v1@2828.64,3356.36 ; v1(2835,3350) 2800,3350 ; v1(3070,2733.57) 3100,2763.57 3100,3330 ; v1@3070,2742.57 ccw(c3070,2764.3) 3085.36,2748.93 ccw(c3100.73,2733.57) v1@3079,2733.57 ; v1(3070,3350) 3080,3350 3100,3330 ; v1@3070.2,3347.01 cw(c3072,3320.66) 3090.67,3339.33 ; v1@3070.61,3341.02 cw(c3073.18,3303.19) 3100,3330 ; v1@4011,2734 cw(c3989.27,2734) 4004.64,2718.64 cw(c4020,2703.27) v1@4020,2725 ; v1(4020,2734) 3992,2706 3992,2582 4028,2546 v1@4028,2115 ; v1@4023.64,2121.36 ccw(c4013.1,2131.9) 4028,2131.9 ; 4028,2127.07 ccw(c4042.07,2127.07) v1@4032.12,2117.12 ; 4028,2141.56 ccw(c4056.56,2141.56) v1@4036.36,2121.36
USB_D+: HF_CORE1.69 R40.1 | length 430.6
  Bottom Layer w6: v1@3350,3946 cw(c3350,3892.82) 3387.61,3930.42 ; v1@3350,3952 cw(c3350,3913.3) 3377.36,3940.67 ; v1(3350,3955) 3363.03,3955 ; v1@3350,3958 cw(c3350,3933.79) 3367.12,3950.91 ; v1@3358.42,3951.81 cw(c3363.03,3950.07) 3363.03,3955 ; v1@3358.42,3958.19 ccw(c3363.03,3959.93) 3363.03,3955 ; v1@3538.64,3756.36 ccw(c3523.27,3771.73) 3545,3771.73 ccw(c3566.73,3771.73) v1@3551.36,3756.36 ; v1(3545,3750) 3545,3773.03 3363.03,3955
USB_D-: HF_CORE1.65 R42.1 | length 1338.7
  Top Layer w6: v1@3878.64,3503.64 cw(c3863.27,3488.27) 3885,3488.27 cw(c3906.73,3488.27) v1@3891.36,3503.64 ; v1(3885,3510) 3885,3355 3915.88,3324.12 HF_CORE1.65@3984,3324.12 ; HF_CORE1.65@3940.57,3317.4 ccw(c3924.35,3301.19) 3924.35,3324.12 ccw(c3924.35,3347.06) HF_CORE1.65@3940.57,3330.84
  Bottom Layer w6: v1@3269.03,3961.74 ccw(c3257.28,3975) 3275,3975 ; v1(3275,3955) 3275,3975 ; v1@3280.97,3961.74 cw(c3292.72,3975) 3275,3975 ; v1@3878.64,3503.64 ccw(c3863.27,3488.27) 3863.27,3510 ccw(c3863.27,3531.73) v1@3878.64,3516.36 ; v1(3885,3510) 3765,3510 3670,3605 3670,3713.13 3582.13,3801 3534,3801 3410,3925 3410,3985 3400,3995 3295,3995 3275,3975
VCC3.3_OUT: HF_CORE1.5 R14.1 R20.1 R21.1 | length 1090.3
  Top Layer w10: R21.1@2342.93,2642.07 ccw(c2325.86,2659.14) 2350,2659.14 ccw(c2374.14,2659.14) R21.1@2357.07,2642.07 ; R20.1@2342.93,2682.93 cw(c2325.86,2665.86) 2350,2665.86 cw(c2374.14,2665.86) R20.1@2357.07,2682.93 ; R20.1@2342.93,2707.07 ccw(c2325.86,2724.14) 2350,2724.14 ccw(c2374.14,2724.14) R20.1@2357.07,2707.07 ; R21.1@2350,2630 R20.1@2350,2695 2350,2790 2405,2845 v1(2405,2880) ; v1@2400.05,2875.05 cw(c2388.1,2863.1) 2405,2863.1 cw(c2421.9,2863.1) v1@2409.95,2875.05
  Top Layer w15: v1(2430,3140) 2430,3165 2471.01,3206.01 HF_CORE1.5@2550,3206.01
  Bottom Layer w10: R14.1@2355,3070 ccw(c2379.14,3070) 2362.07,3052.93 ; R14.1@2355,3080 cw(c2391.22,3080) 2365.61,3105.61 ; R14.1@2365,3070 ccw(c2413.29,3070) 2379.14,3035.86 ; R14.1@2365,3080 cw(c2425.36,3080) 2382.68,3122.68 ; v1@2400.05,2884.95 ccw(c2388.1,2896.9) 2405,2896.9 ccw(c2421.9,2896.9) v1@2409.95,2884.95 ; v1(2405,2880) 2405,3010 2355,3060 R14.1@2355,3075 2355,3095 2400,3140 v1(2430,3140) ; v1@2425.05,3135.05 ccw(c2413.1,3123.1) 2413.1,3140 ccw(c2413.1,3156.9) v1@2425.05,3144.95
VCC3.3V_CHIP: C9.1 C10.1 C13.2 R4.2 R6.2 R7.1 R9.2 R11.2 R12.2 R33.2 R34.2 R45.2 TF1.4 U2.5 VP1.3 | length 4748
  Top Layer w6: R7.1@2755,4220 2769,4220 2786,4237 ; R7.1@2761.78,4225.73 ccw(c2766.86,4242.09) 2778.97,4229.97 ; R7.1@2763.56,4231.46 ccw(c2770.19,4252.81) 2786,4237 ; R7.1@2772,4220 cw(c2779.24,4220) R7.1@2774.12,4225.12 ; 2928.49,4249.02 cw(c2899.47,4220) C9.1@2940.51,4220 ; 2938.73,4238.78 cw(c2919.95,4220) C9.1@2946.51,4220 ; 2940.56,4236.95 ccw(c2952.51,4248.9) C9.1@2952.51,4232 ; C9.1@2957.51,4220 2927.51,4250 2869,4250 2856,4237 2786,4237
  Top Layer w10: R6.2@3587.93,4051.93 cw(c3568.44,4032.44) 3596,4032.44 ; R6.2@3587.93,4076.07 ccw(c3568.44,4095.56) 3596,4095.56 ; R12.2@3588.93,3887.07 ccw(c3571.86,3904.14) 3596,3904.14 ccw(c3620.14,3904.14) R12.2@3603.07,3887.07 ; R9.2@3588.93,3987.93 cw(c3571.86,3970.86) 3596,3970.86 cw(c3620.14,3970.86) R9.2@3603.07,3987.93 ; R9.2@3588.93,4012.07 ccw(c3571.86,4029.14) 3596,4029.14 ccw(c3620.14,4029.14) R9.2@3603.07,4012.07 ; R4.2@3588.93,4104.93 cw(c3571.86,4087.86) 3596,4087.86 cw(c3620.14,4087.86) R4.2@3603.07,4104.93 ; R11.2@3589.93,3924.93 cw(c3575.27,3910.27) 3596,3910.27 ; R11.2@3589.93,3949.07 ccw(c3575.27,3963.73) 3596,3963.73 ; R12.2@3596,3877 R9.2@3596,4000 R4.2@3596,4113 ; 3596,3905.44 cw(c3623.56,3905.44) R11.2@3604.07,3924.93 ; 3596,3968.56 ccw(c3623.56,3968.56) R11.2@3604.07,3949.07 ; 3596,4037.27 cw(c3616.73,4037.27) R6.2@3602.07,4051.93 ; 3596,4090.73 ccw(c3616.73,4090.73) R6.2@3602.07,4076.07
  Top Layer w20: U2.5@2958,4130 2957.51,4130.49 C9.1@2957.51,4220 C10.1@3025,4220
  Top Layer w25: U2.5@2958,4130 2996.5,4091.5 2996.5,3931.5 3038,3890 v3(3360,3890) 3534,3890 v1(3559,3865) 3586,3865 R12.2@3596,3875 ; U2.5@2965.5,4130 ccw(c2983.61,4130) 2970.8,4117.2 ; 3577.89,3865 ccw(c3577.89,3888.11) R12.2@3594.23,3871.77
  Bottom Layer w15: 3360,2680 3580.38,2459.62 R33.2@3580.38,2422 R34.2@3646,2422 ; 3360,2750 3361,2749 ; 3360,2845 3470,2845 ; 3488.9,2863.9 cw(c3511.31,2841.49) R45.2@3518.77,2872.29 ; R45.2@3509.71,2866.78 ccw(c3533.3,2861.03) 3516.13,2843.87 ; R45.2@3511.7,2859.7 cw(c3498.89,2846.89) 3517,2846.89 cw(c3535.11,2846.89) R45.2@3522.3,2859.7 ; R45.2@3511.7,2864.7 ccw(c3498.89,2851.89) 3498.89,2870 ccw(c3498.89,2888.11) R45.2@3511.7,2875.3 ; R45.2@3511.7,2880.3 ccw(c3498.89,2893.11) 3517,2893.11 ccw(c3535.11,2893.11) R45.2@3522.3,2880.3 ; R45.2@3515.23,2857.71 ccw(c3503.94,2811.06) 3470,2845 ; VP1.3@3516,2749 VP1.3@3521,2744 3554,2744 3575,2765 3575,2815 3565,2825 3535,2825 ; R45.2@3524.29,2863.22 ccw(c3563.64,2853.64) 3535,2825 ; VP1.3@3543.5,2749 ccw(c3543.5,2786.42) 3569.96,2759.96 ; v1(3559,3865) 3602,3865 v1(3703,3764) ; R33.2@3575.07,2427.3 ccw(c3562.27,2440.11) 3580.38,2440.11 ccw(c3598.48,2440.11) R33.2@3585.68,2427.3 ; R33.2@3590.68,2416.7 cw(c3603.48,2403.89) 3603.48,2422 cw(c3603.48,2440.11) R33.2@3590.68,2427.3 ; C13.2@3594.7,2949.7 ccw(c3581.89,2936.89) 3581.89,2955 ccw(c3581.89,2973.11) C13.2@3594.7,2960.3 ; C13.2@3600,2955 3535,2955 3517,2937 R45.2@3517,2870 ; R34.2@3635.7,2416.7 ccw(c3622.89,2403.89) 3622.89,2422 ccw(c3622.89,2440.11) R34.2@3635.7,2427.3 ; v1@3695,3762 3695.66,3761.34 TF1.4@3756.18,3761.34 ; v1@3706.18,3767.18 ccw(c3720.29,3781.29) 3720.29,3761.34 ; TF1.4@3734.02,3756.9 ccw(c3723.3,3746.18) 3723.3,3761.34 ccw(c3723.3,3776.5) TF1.4@3734.02,3765.78 ; 3470,2845 3495,2870 R45.2@3517,2870 ; R45.2@3517,2870 3517,2843 3535,2825
  Bottom Layer w20: 3360,2680 3360,2750 3360,2845 v3(3360,3890)
VCC5V_CHIP: AX1.14 C1.2 C16.1 C17.1 C18.1 C25.1 C26.1 C27.1 CAN.3 D3.2 f1.2 GPS.6 HF_CORE1.23 IIC.3 motor1.5 motor2.5 motor3.5 motor4.5 R1.1 R3.1 R8.1 R10.1 R13.1 R38.1 R43.2 R47.1 SERVO1.2 SERVO1.5 SERVO1.8 SERVO1.11 SERVO2.2 SERVO2.5 SERVO2.8 SERVO2.11 SERVO3.2 SERVO3.5 SERVO3.8 SERVO3.11 SPI.5 U2.1 UART2.3 UART4.3 UART6.3 | length 18956.8
  Top Layer w10: R47.1@4135,1270 4198,1270 4206,1262 ; R47.1@4142.07,1262.93 cw(c4159.14,1245.86) 4159.14,1270 cw(c4159.14,1294.14) R47.1@4142.07,1277.07 ; R8.1@4272.93,3661.07 ccw(c4255.86,3678.14) 4280,3678.14 ccw(c4304.14,3678.14) R8.1@4287.07,3661.07 ; R3.1@4272.93,3734.93 cw(c4255.86,3717.86) 4280,3717.86 cw(c4304.14,3717.86) R3.1@4287.07,3734.93 ; R3.1@4272.93,3759.07 ccw(c4255.86,3776.14) 4280,3776.14 ccw(c4304.14,3776.14) R3.1@4287.07,3759.07 ; R1.1@4272.93,3832.93 cw(c4255.86,3815.86) 4280,3815.86 cw(c4304.14,3815.86) R1.1@4287.07,3832.93 ; 4275,1337 4281,1343 4276,1348 ; R8.1@4280,3649 R3.1@4280,3747 R1.1@4280,3845
  Top Layer w15: 2258,3620 v1(2335,3620) ; 3390,4173 3390,3985 ; 3403.8,3971.2 ccw(c3424.84,3992.23) C1.2@3439.74,3966.49 ; C1.2@3432.23,3979.47 cw(c3414.71,4009.71) 3390,3985 ; C1.2@3445,3960 3415,3960 3390,3985 ; R13.1@4164,4118 4203,4118 4204.42,4119.42 ; R13.1@4180.3,4125.3 ccw(c4197.93,4142.93) 4197.93,4118
  Top Layer w20: D3.2@3193.54,4055.7 ccw(c3180.37,4068.88) 3199,4068.88 ccw(c3217.63,4068.88) D3.2@3204.46,4055.7 ; D3.2@3199,4045.46 3199,4152 3205,4158 ; 4005,1940 4007.43,1942.43 GPS.6@4007.43,2035
  Top Layer w25: 2258,1597 2263.57,1602.57 ; v2@2340,1604.25 v2(2340,1605) ; UART2.3@2631.43,1727 2631.43,1939.43 ; 2631.43,1957.43 UART4.3@2631.43,2035 ; 2875,1070 2877.43,1072.43 v2(2877.43,1161.57) ; 3240,1940 3245.93,1945.93 IIC.3@3245.93,2035 ; SPI.5@3273.43,1727 3273.43,1940 ; v2(3681.43,1166) 3681.43,1076.57 3688,1070 ; UART6.3@3908.43,1727 3908.43,1938.43 3910,1940 ; v2(4185,2687.43) 4185.57,2688 4279,2688 4281,2686 ; v2(4196,1606) 4278,1606 4281,1603
  Top Layer w30: 2258,2247 2261,2250 2765,2250 2795.23,2280.23 HF_CORE1.23@2795.23,2386 ; 2737.69,4128.31 ccw(c2765,4155.63) R10.1@2765,4117 ; R10.1@2775,4117 cw(c2806.39,4085.61) 2806.39,4130 ; U2.1@2858,4130 2783,4130 R10.1@2770,4117 2749,4117 2681,4185 2681,4289 2712,4320 3066,4320 3083,4303 3083,4213 3138,4158 3205,4158 3375,4158 3502,4285 C17.1@3567,4285 C18.1@3637,4285 4055,4285 v4(4080,4260) ; 3959.29,4285 cw(c3959.29,4139.29) v4@4062.32,4242.32 ; 4031.72,4285 cw(c4031.72,4211.72) v4@4083.54,4263.54
  Top Layer w50: 2258,3658 2258,3620 2258,2247 2258,1597 2258,1337 2525,1070 2875,1070 3688,1070 4014,1070 4206,1262 4275,1331 4275,1337 ; 2263.57,1602.57 2265,1604 2431,1604 2560,1475 SERVO1.11@2575,1475 SERVO1.8@2695,1475 SERVO1.5@2815,1475 SERVO1.2@2935,1475 SERVO2.11@3055,1475 SERVO2.8@3175,1475 SERVO2.5@3295,1475 SERVO2.2@3415,1475 SERVO3.11@3535,1475 SERVO3.8@3655,1475 SERVO3.5@3775,1475 SERVO3.2@3895,1475 ; 2541.66,1493.34 ccw(c2575,1526.67) SERVO1.11@2575,1479.53 ; 2610,1940 3240,1940 3273.43,1940 3910,1940 4005,1940 4276,1940 4281,1945 ; v4@4066.92,4256.92 4204.42,4119.42 ; v4@4095,4260 ccw(c4170.23,4260) 4117.03,4206.81 ; R13.1@4169.78,4123.53 cw(c4184.49,4099.49) 4204.42,4119.42 ; R13.1@4173.74,4129.92 cw(c4178.37,4093.37) 4204.42,4119.42 ; R13.1@4175,4125 cw(c4175,4067.44) 4215.7,4108.14 ; 4175.21,4148.63 cw(c4151.59,4125) R13.1@4185,4125 ; 4281,1343 4281,1603 4281,1945 ; R8.1@4287.07,3646.93 ccw(c4258.27,3675.73) 4299,3675.73 ; R8.1@4287.07,3651.07 cw(c4258.27,3622.27) 4299,3622.27 ; R3.1@4287.07,3744.93 ccw(c4258.27,3773.73) 4299,3773.73 ; R3.1@4287.07,3749.07 cw(c4258.27,3720.27) 4299,3720.27 ; R1.1@4287.07,3842.93 ccw(c4258.27,3871.73) 4299,3871.73 ; R1.1@4287.07,3847.07 cw(c4258.27,3818.27) 4299,3818.27 ; 4204.42,4119.42 4299,4024.84 4299,3509 4110,3320 4110,3054 4281,2883 4281,2686 4281,1945
  Bottom Layer w15: 2318.78,3608.78 cw(c2335,3592.57) v1@2335,3615.5 ; AX1.14@2334.7,3278.7 cw(c2321.89,3265.89) 2340,3265.89 cw(c2358.11,3265.89) AX1.14@2345.3,3278.7 ; AX1.14@2334.7,3329.3 ccw(c2321.89,3342.11) 2340,3342.11 ccw(c2358.11,3342.11) AX1.14@2345.3,3329.3 ; v1@2338.18,3616.82 cw(c2370.01,3584.99) R38.1@2370.01,3630 ; 2355.66,3236.34 ccw(c2377,3257.68) C16.1@2377,3227.5 ; R38.1@2374.7,3624.7 ccw(c2361.89,3611.89) 2361.89,3630 ccw(c2361.89,3648.11) R38.1@2374.7,3635.3 ; C16.1@2377,3215 2340,3252 AX1.14@2340,3304 2340,3425 2305,3460 2305,3595 2340,3630 R38.1@2380,3630 2380,3645 2405,3670 2545,3670 R43.2@2585,3630 ; R38.1@2387.5,3635 cw(c2429.75,3635) 2399.88,3664.88 ; 2563.66,3651.34 ccw(c2585,3672.68) R43.2@2585,3642.5 ; SERVO1.11@2575,1475 2592,1458 C25.1@2637,1458 cw(c2637,1504.73) SERVO1.11@2594.86,1484.52 ; SERVO1.11@2581.34,1478.04 ccw(c2613.17,1493.3) 2613.17,1458 ; 2611.83,1464.74 cw(c2606,1442.99) C25.1@2625.5,1454.25 ; C25.1@2617.86,1463.13 ccw(c2621.4,1476.35) C25.1@2628.25,1464.49 ; C25.1@2626.7,1452.7 ccw(c2613.89,1439.89) 2613.89,1458 ccw(c2613.89,1476.11) C25.1@2626.7,1463.3
  Bottom Layer w20: SERVO2.5@3294.69,1475.35 cw(c3314.12,1453.27) 3334.93,1474.07 ; SERVO2.5@3307.9,1460.34 cw(c3328.24,1437.24) C26.1@3350,1459 3334,1475 ; SERVO2.5@3310.64,1463.3 cw(c3334,1445.82) 3334,1475 ; SERVO2.5@3310.64,1486.7 ccw(c3334,1504.18) 3334,1475 ; C26.1@3340.01,1459.28 ccw(c3319.42,1460.42) 3334,1475 ; C26.1@3341.43,1455.5 ccw(c3295,1409.99) SERVO2.5@3295,1475 3334,1475 ; 3342.62,1475 cw(c3342.62,1456.66) C26.1@3355.71,1469.5 ; SERVO3.11@3534.72,1475.38 cw(c3553.43,1450.19) 3575.62,1472.38 ; SERVO3.11@3546.65,1459.33 cw(c3567.4,1431.4) C27.1@3592,1456 3573,1475 ; SERVO3.11@3550.88,1463.63 cw(c3573,1447.8) 3573,1475 ; SERVO3.11@3550.88,1486.37 ccw(c3573,1502.2) 3573,1475 ; 3574.93,1473.07 cw(c3557.86,1456) C27.1@3582,1456 ; 3578.33,1475 cw(c3578.33,1448.61) C27.1@3598.41,1465.73 ; C27.1@3583.19,1452.76 ccw(c3535,1411.67) SERVO3.11@3535,1475 3573,1475
  Bottom Layer w25: v2(2340,1605) 2334,1601 2335.57,1602.57 motor1.5@2408,1602.57 ; v2@2345.3,1610.3 ccw(c2363.96,1628.96) 2363.96,1602.57 ; motor2.5@2877.43,1230 v2(2877.43,1161.57) v2@2879,1160 ; motor3.5@3681.43,1230 v2(3681.43,1166) 3681.43,1162.57 v2@3682,1162 ; motor4.5@4131,1602.43 4201.57,1602.43 4202,1602 v2(4196,1606) ; CAN.3@4131,2687.43 v2(4185,2687.43) ; 4169.26,1602.43 ccw(c4169.26,1632.74) v2@4190.7,1611.3
  Bottom Layer w80: f1.2@4005,4260 v4(4080,4260)
VCC_BATTERY: D1.1 DSERVO.2 power1.1 R2.1 | length 1173.6
  Top Layer w10: power1.1@2580,3880 2595,3880 2694,3979 R2.1@2777,3979 ; power1.1@2580,3884.53 ccw(c2580,3931.67) 2613.34,3898.34 ; power1.1@2580,3894.53 ccw(c2580,3965.81) 2630.41,3915.41 ; power1.1@2580,3904.53 ccw(c2580,3999.96) 2647.48,3932.48 ; power1.1@2604.53,3880 cw(c2627.53,3880) 2611.26,3896.26 ; R2.1@2764.93,3971.93 ccw(c2747.86,3954.86) 2747.86,3979 ccw(c2747.86,4003.14) R2.1@2764.93,3986.07
  Top Layer w80: 2296,3910 2481,3910 ; power1.1@2580,3880 2511,3880 ; power1.1@2580.1,3869.53 cw(c2578.72,4007.71) 2481,3910 ; power1.1@2585.44,3871.05 cw(c2553.92,3922.91) 2511,3880 ; 2481,3910 2511,3880
  Bottom Layer w80: D1.1@2467.53,3746.84 cw(c2517.47,3746.84) 2482.15,3782.15 ; D1.1@2478,3737 2478,3778 power1.1@2580,3880
VCC_USB5V: D3.1 f2.2 f3.2 HF_CORE1.66 | length 2243.5
  Top Layer w20: f3.2@3115,3955 3185.46,3955 D3.1@3199,3968.54 cw(c3178.75,3988.79) v2@3164.85,3963.74 ; f3.2@3125.61,3944.39 cw(c3151.21,3918.79) 3151.21,3955 cw(c3151.21,3991.21) f3.2@3125.61,3965.61 ; f3.2@3136.91,3951.17 cw(c3141.63,3933.55) v2@3153.5,3947.4 ; f3.2@3136.91,3958.83 ccw(c3141.63,3976.45) v2@3153.5,3962.6 ; v2@3152.93,3947.93 ccw(c3135.86,3930.86) 3135.86,3955 ccw(c3135.86,3979.14) v2@3152.93,3962.07 ; v2@3155.15,3946.26 ccw(c3165.36,3964.66) 3180.24,3949.78 ; v2@3159.24,3955 ccw(c3159.24,4003.51) D3.1@3193.54,3969.21 ; v2@3165,3963.66 ccw(c3176.74,3983.99) D3.1@3182.81,3961.32 ; v2@3167.07,3947.93 cw(c3184.14,3930.86) 3184.14,3955 cw(c3184.14,3979.14) v2@3167.07,3962.07 ; v2@3168.66,3950 cw(c3190.15,3937.59) D3.1@3183.73,3961.56 ; v2@3976.93,3512.93 cw(c3959.86,3495.86) 3984,3495.86 cw(c4008.14,3495.86) v2@3991.07,3512.93 ; HF_CORE1.66@3984,3363.49 v2(3984,3520) ; 3984,3384.49 ccw(c4014.49,3384.49) HF_CORE1.66@3992.93,3362.93 ; 3984,3432.77 ccw(c4062.77,3432.77) v2@4007.07,3377.07
  Bottom Layer w20: v2@3150,3955 3215,4020 3405,4020 3435,3990 3435,3930 3545,3820 3590,3820 3695,3715 3695,3620 3765,3550 3970,3550 ; v2@3170,3955 cw(c3218.28,3955) 3184.14,3989.14 ; f2.2@3921,3317 ccw(c3907.5,3335) 3930,3335 ; f2.2@3930,3305 3930,3335 ; f2.2@3930.36,3303.13 cw(c3965.1,3317.13) 3938.61,3343.61 ; f2.2@3939,3317 cw(c3952.5,3335) 3930,3335 ; f2.2@3948.91,3310.61 cw(c3995.57,3329.42) 3960,3365 ; 3963.79,3365 ccw(c3963.79,3406.21) v2@3992.93,3377.07 ; v2@3974.85,3524.04 ccw(c3953.48,3533.48) 3970,3550 ; v2(3984,3520) 3984,3536 3970,3550 ; v2(4000,3370) 4015,3370 4020,3365 3960,3365 ; 3930,3335 3960,3365
  other v2: 3160,3955
pads on no net: AX1.11 AX1.12 AX1.13 HF_CORE1.2 HF_CORE1.10 HF_CORE1.12 HF_CORE1.13 HF_CORE1.34 HF_CORE1.37 HF_CORE1.49 HF_CORE1.53 HF_CORE1.56 HF_CORE1.57 HF_CORE1.64 HF_CORE1.76 HF_CORE1.77 HF_CORE1.79 HF_CORE1.80 HF_CORE1.81 HF_CORE1.83 HF_CORE1.88 power1.3 SWD.1 TF1.0 USB1.4 USB1.6 USB2.4 USB2.6

## Polygon pours and split planes (outlines as drawn)
GND_CHIP on Top Layer "Top-Layer-GND" (solid, remove dead copper, pour order 7): 2205,4355 4335,4355 4335,1025 2205,1025
GND_CHIP on Bottom Layer "Bottom-Layer-GND" (solid, remove dead copper, pour order 9): 2205,4355 4335,4355 4335,1025 2205,1025

## Keep-outs
Keep-Out Layer:
  the board outline again, w10

## Silkscreen, mask and mechanical layers (free items; w line width, h text height)
Bottom Overlay:
  text "HANDS FREE" at 4030,2025 h300
  text "ControlUnit V2" at 3790,1830 h250

## Text inside footprints (layer, text, board x,y; h text height)
B1: Top Overlay "+" at 4055,4085 h80 r180
U1: Bottom Overlay "Output 5V" at 3396,3700 h39.37; Bottom Overlay "Input 7~28V" at 3396,3775 h39.37; Bottom Overlay "VIn+" at 3021,3950 h39.37; Bottom Overlay "VIn-" at 3021,3550 h39.37; Bottom Overlay "VOut+" at 3421,3950 h39.37; Bottom Overlay "VOut-" at 3421,3550 h39.37